# Altium PCB S10B-M-V2.0.PcbDoc (part 1 of 2)
Units mm, origin at the board's own origin, x right, y up, seen from the top; angles counter-clockwise.
Board outline 236.42 x 127.48 mm, 3 copper layers (Top Layer, Internal Plane 2, Bottom Layer); 189 components, 141 nets, 609 pads, 390 vias.
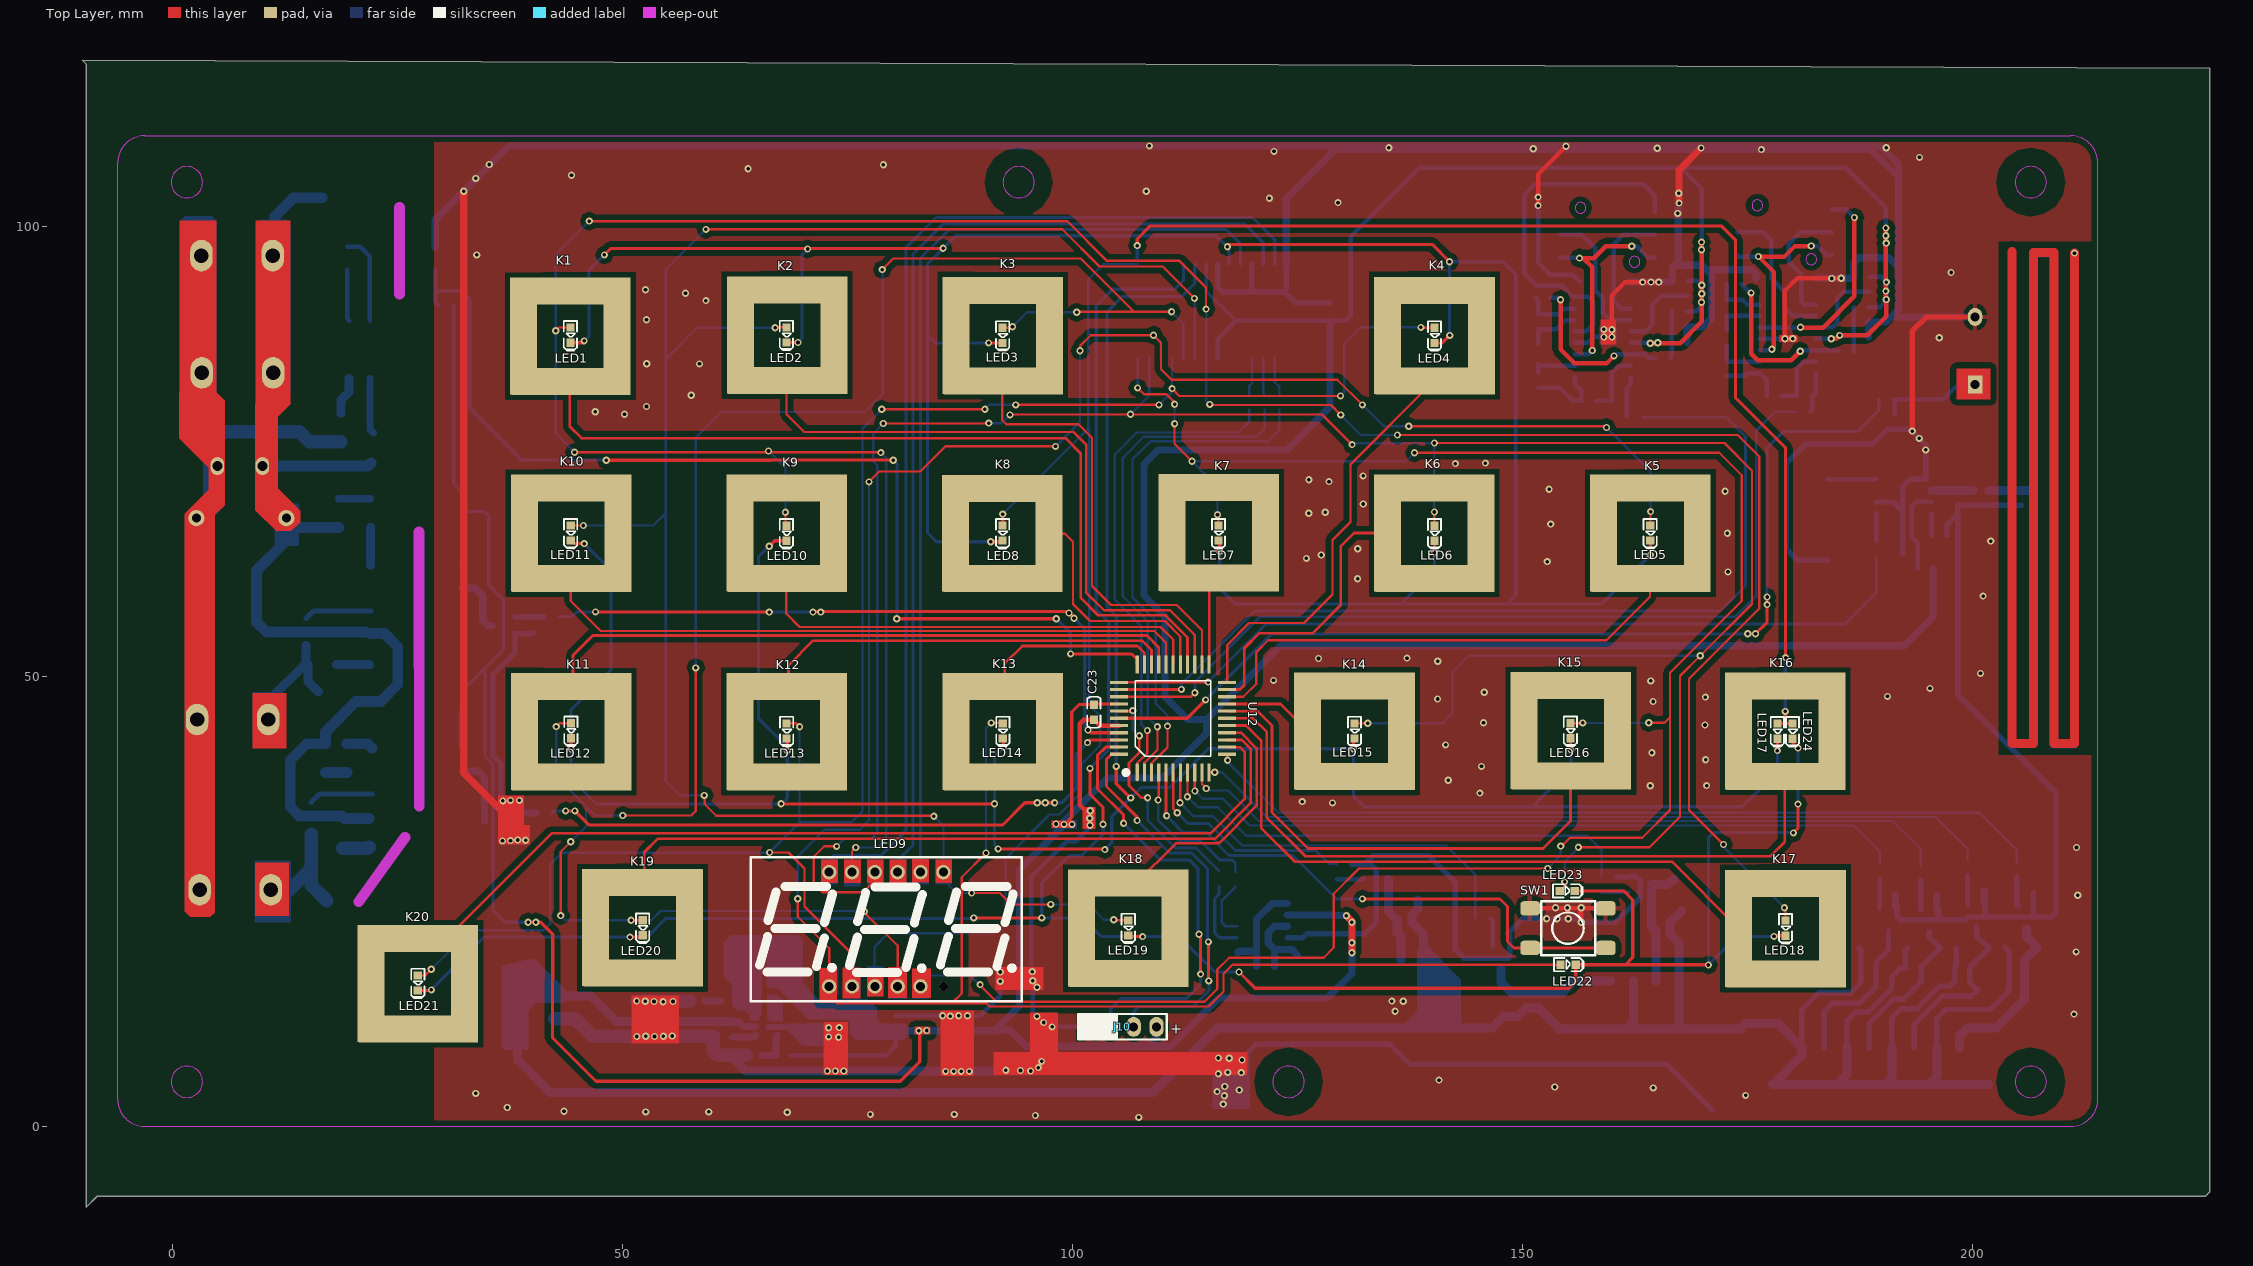
[diagram p0: Top Layer view]
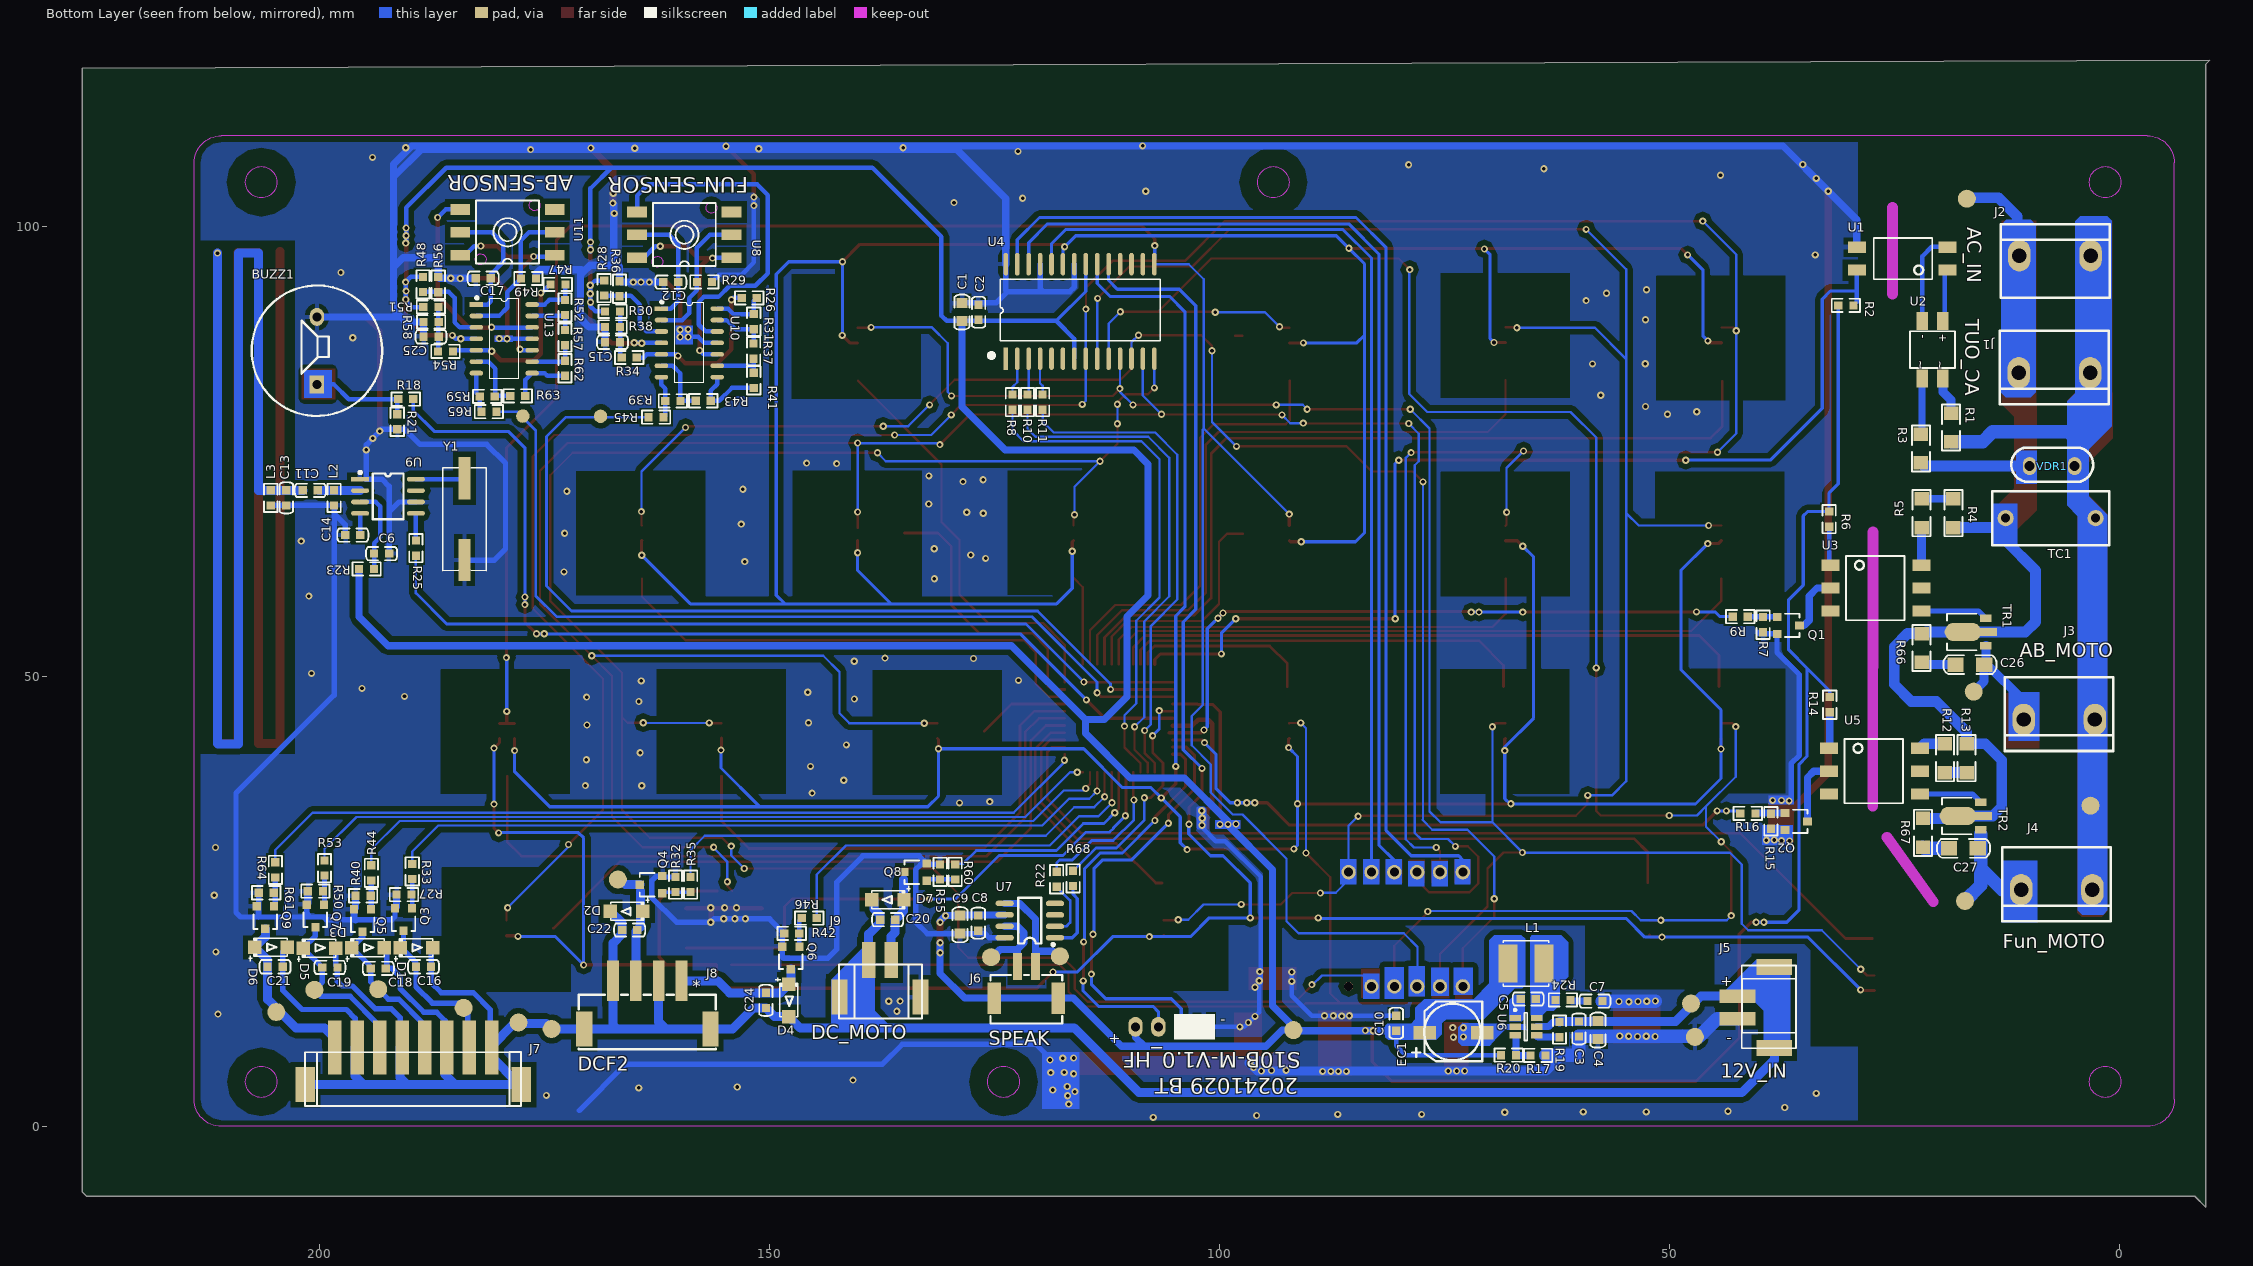
[diagram p1: Bottom Layer view, seen from below]
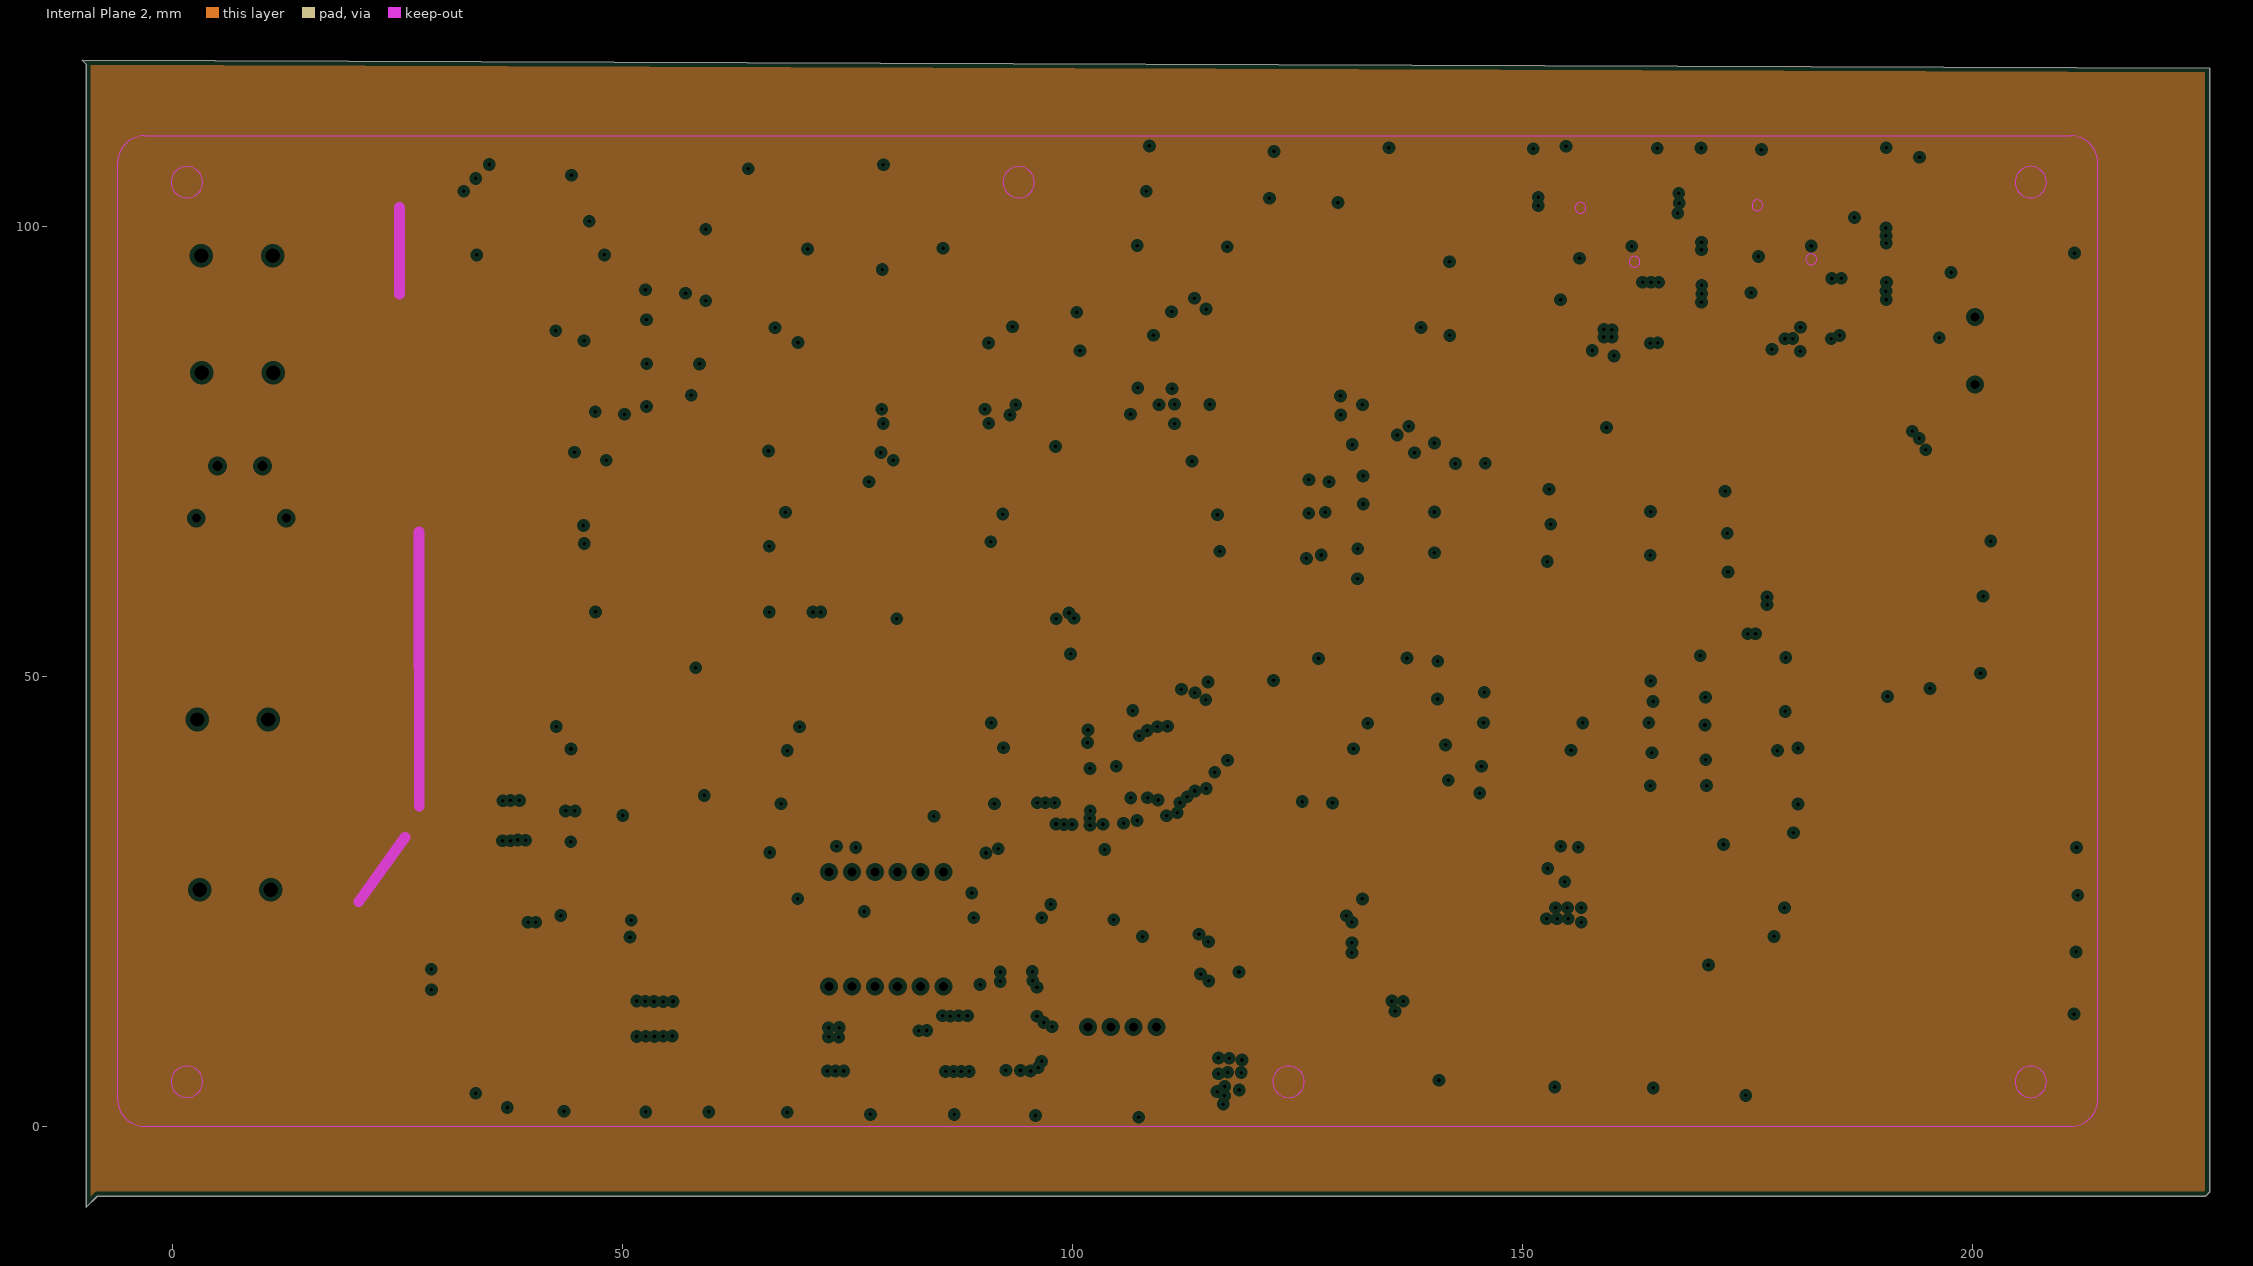
[diagram p2: Internal Plane 2, clearances drawn from the general rule]

## Layer stack, top to bottom
Top Solder: solder mask 0.0102, Solder Resist, Dk 3.5
Top Layer: signal copper 0.0356
Dielectric 1: dielectric 0.32, FR-4, Dk 4.8
Internal Plane 2: plane copper 0.0356
Dielectric2: dielectric 0.32, FR-4, Dk 4.8
Bottom Layer: signal copper 0.0356
Bottom Solder: solder mask 0.0102, Solder Resist, Dk 3.5

## Board outline
-10.033,118.466 -9.627,118.059 -9.627,-9.017 -8.382,-7.772 225.958,-7.772 226.39,-7.341 226.39,117.627

## Design rules (kind name [scope] priority, off if disabled: settings)
Clearance [All] p1: gap=0.2
MinimumSolderMaskSliver [All] p1: minsoldermaskwidth=0
PlaneClearance [All] p1: clearance=0.508
PlaneConnect [All] p1: planeconnectstyle=Relief reliefexpansion=0.508 reliefentries=4 reliefconductorwidth=0.5 reliefairgap=0.254
PolygonConnect PolygonConnect_1 [IsVia] p1: connectstyle=Direct reliefconductorwidth=0.254 reliefentries=4 polygonreliefangle="90 Angle" airgapwidth=0.254
PolygonConnect [All] p2: connectstyle=Relief reliefconductorwidth=0.5 reliefentries=4 polygonreliefangle="90 Angle" airgapwidth=0.5
RoutingVias [All] p1: holewidth=0.3 width=0.6 viastyle="Through Hole" minholewidth=0.3 minwidth=0.4 maxholewidth=1.5 maxwidth=2
SilkToSilkClearance [All] p1: silktosilkclearance=0
SilkToSolderMaskClearance [IsPad] p1: minsilkscreentomaskgap=0 clearancetoexposedcopper=TRUE
SolderMaskExpansion [All] p1: expansion=0.102
Width [All] p1: maxlimit=2 minlimit=0.2 preferedwidth=0.254 minimp=50.000000 maximp=50.000000 favimp=50.000000
25 further rules are at their usual default settings.

## Components (designator, comment, footprint, x,y, rotation, side; value= is the part's Value field where it differs from the comment)
BUZZ1 "Speaker" BUZ-1407-7.5 200.33,86.208 r0 bottom
C1 "106" 0805C 128.636,91.518 r270 bottom
C2 "104" 0603C 126.782,91.315 r270 bottom
C3 "104" 0603C 60.056,11.66 r270 bottom
C4 "106" 0805C 57.948,11.711 r270 bottom
C5 "104" 0603C 66.533,14.149 r180 bottom
C6 "1uF" 0603C 193.98,63.652 r180 bottom
C7 "103" 0603C 57.44,13.921 r0 bottom
C8 "104" 0603C 126.822,23.419 r270 bottom
C9 "106" 0805C 128.854,23.419 r270 bottom
C10 "104" 0603C 80.366,10.617 r90 bottom
C11 "2.7pF" 0603C 201.905,70.688 r180 bottom
C12 "103" 0603C 161.834,93.829 r180 bottom
C13 "5.6pF" 0603C 203.733,69.012 r90 bottom
C14 "0.47uF" 0603C 195.504,65.71 r0 bottom
C15 "103" 0603C 168.311,87.149 r180 bottom
C16 "104" 0603C 187.64,17.731 r0 bottom
C17 "103" 0603C 182.687,94.261 r180 bottom
C18 "104" 0603C 192.67,17.553 r0 bottom
C19 "104" 0603C 198.054,17.655 r0 bottom
C20 "104" 0603C 137.729,22.963 r180 bottom
C21 "104" 0603C 204.14,17.729 r0 bottom
C22 "104" 0603C 166.406,21.82 r180 bottom
C23 "104" 0603C 102.387,46.863 r270 top
C24 "104" 0603C 150.429,13.159 r90 bottom
C25 "103" 0603C 188.479,87.759 r180 bottom
C26 "102 1KV" 1206C 18.212,51.308 r180 bottom
C27 "102 1KV" 1206C 18.923,30.886 r180 bottom
D1 "A7" SOD-123FL_L2.8-W1.8-LS3.7 189.266,19.839 r180 bottom
D2 "A7" SOD-123FL_L2.8-W1.8-LS3.7 165.898,23.903 r0 bottom
D3 "A7" SOD-123FL_L2.8-W1.8-LS3.7 194.651,19.839 r180 bottom
D4 "A7" SOD-123FL_L2.8-W1.8-LS3.7 147.864,13.997 r270 bottom
D5 "A7" SOD-123FL_L2.8-W1.8-LS3.7 200.05,19.812 r180 bottom
D6 "A7" SOD-123FL_L2.8-W1.8-LS3.7 205.435,19.888 r180 bottom
D7 "A7" SOD-123FL_L2.8-W1.8-LS3.7 136.881,25.197 r0 bottom
EC1 "100uF/10V" "CAP SMD 6.3*5.5mm" 77.216,10.389 r90 bottom
J1 "AC_OUT" K-VH3.96-3P 7.199,83.745 r90 bottom
J2 "AC_IN" K-VH3.96-3P 7.148,96.776 r270 bottom
J3 "AB_MOTO" K-VH3.96-3P 6.665,45.214 r90 bottom
J4 "Fun_MOTO" K-VH3.96-3P 6.945,26.291 r90 bottom
J5 "12V_IN" "CON2-SMD-XHB 2*2.5MM" 40.397,13.21 r270 bottom
J6 "SPEAK" CON2-SMD_PH2.0-1X2PW 121.473,16.004 r0 bottom
J7 "" "CON8-SMD-XHB 8*2.5MM" 180.873,8.738 r0 bottom
J8 "DCF2" CON4-SMD_4P-P2.54_XH2.54-4AB 163.612,13.489 r0 bottom
J9 "DC_MOTO" "CON2-SMD-XHB 2*2.5MM" 137.755,16.435 r0 bottom
J10 "ISP1" "CON4 -2.54-H" 101.727,11.049 r0 top
K1 "Φ15 H8mm弹簧" TK_HF-13*13*8 44.196,87.808 r180 top
K2 "Φ15 H8mm弹簧" TK_HF-13*13*8 68.286,87.936 r180 top
K3 "Φ15 H8mm弹簧" TK_HF-13*13*8 92.253,87.884 r180 top
K4 "Φ15 H8mm弹簧" TK_HF-13*13*8 140.244,87.886 r180 top
K5 "Φ15 H8mm弹簧" TK_HF-13*13*8 164.247,65.915 r180 top
K6 "Φ15 H8mm弹簧" TK_HF-13*13*8 140.219,65.915 r180 top
K7 "Φ15 H8mm弹簧" TK_HF-13*13*8 116.266,65.965 r180 top
K8 "Φ15 H8mm弹簧" TK_HF-13*13*8 92.213,65.889 r180 top
K9 "Φ15 H8mm弹簧" TK_HF-13*13*8 68.26,65.915 r180 top
K10 "Φ15 H8mm弹簧" TK_HF-13*13*8 44.283,65.915 r180 top
K11 "Φ15 H8mm弹簧" TK_HF-13*13*8 44.283,43.867 r180 top
K12 "Φ15 H8mm弹簧" TK_HF-13*13*8 68.235,43.867 r180 top
K13 "Φ15 H8mm弹簧" TK_HF-13*13*8 92.263,43.867 r180 top
K14 "Φ15 H8mm弹簧" TK_HF-13*13*8 131.354,43.893 r180 top
K15 "Φ15 H8mm弹簧" TK_HF-13*13*8 155.408,43.944 r180 top
K16 "Φ15 H8mm弹簧" TK_HF-13*13*8 179.233,43.918 r180 top
K17 "Φ15 H8mm弹簧" TK_HF-13*13*8 179.258,21.973 r180 top
K18 "Φ15 H8mm弹簧" TK_HF-13*13*8 106.208,22.023 r180 top
K19 "Φ15 H8mm弹簧" TK_HF-13*13*8 52.208,22.049 r180 top
K20 "Φ15 H8mm弹簧" TK_HF-13*13*8 27.239,15.851 r180 top
L1 "4.7uH" INDC5050 65.924,18.112 r180 bottom
L2 "39nH" 0603R 198.425,69.012 r90 bottom
L3 "22nH" 0603R 205.461,69.012 r90 bottom
LED1 "LED_0603" LED_0603 44.207,88.8 r270 top
LED2 "LED_0603" LED_0603 68.21,88.825 r270 top
LED3 "LED_0603" LED_0603 92.238,88.775 r270 top
LED4 "LED_0603" LED_0603 140.244,88.775 r270 top
LED5 "LED_0603" LED_0603 164.222,66.804 r270 top
LED6 "LED_0603" LED_0603 140.244,66.778 r270 top
LED7 "LED_0603" LED_0603 116.241,66.804 r270 top
LED8 "LED_0603" LED_0603 92.238,66.804 r270 top
LED9 "4301AB" LED4031-SEG-TH_12P-L30.1-W16.0-P2.54-S12.70-BL 79.309,21.896 r0 top
LED10 "LED_0603" LED_0603 68.21,66.778 r270 top
LED11 "LED_0603" LED_0603 44.232,66.804 r270 top
LED12 "LED_0603" LED_0603 44.257,44.833 r270 top
LED13 "LED_0603" LED_0603 68.235,44.807 r270 top
LED14 "LED_0603" LED_0603 92.263,44.807 r270 top
LED15 "LED_0603" LED_0603 131.354,44.807 r270 top
LED16 "LED_0603" LED_0603 155.357,44.833 r270 top
LED17 "LED_0603" LED_0603 178.359,44.78 r270 top
LED18 "LED_0603" LED_0603 179.258,22.887 r270 top
LED19 "LED_0603" LED_0603 106.208,22.912 r270 top
LED20 "LED_0603" LED_0603 52.233,22.938 r270 top
LED21 "LED_0603" LED_0603 27.239,16.791 r270 top
LED22 "LED_0603" LED_0603 154.239,17.959 r0 top
LED23 "LED_0603" LED_0603 154.138,26.164 r0 top
LED24 "LED_0603" LED_0603 180.035,44.78 r270 top
Q1 "2N7002K" "SOT-23 - MOS" 36.79,55.678 r270 bottom
Q2 "2N7002K" "SOT-23 - MOS" 35.901,33.885 r270 bottom
Q3 "2N7002K" "SOT-23 - MOS" 190.703,22.962 r0 bottom
Q4 "2N7002K" "SOT-23 - MOS" 163.195,26.848 r90 bottom
Q5 "2N7002K" "SOT-23 - MOS" 195.25,22.86 r0 bottom
Q6 "2N7002K" "SOT-23 - MOS" 147.661,18.721 r0 bottom
Q7 "2N7002K" "SOT-23 - MOS" 200.508,23.393 r0 bottom
Q8 "2N7002K" "SOT-23 - MOS" 133.782,28.245 r90 bottom
Q9 "2N7002K" "SOT-23 - MOS" 206.07,23.19 r0 bottom
R1 "39K" 1206R 18.694,79.273 r270 bottom
R2 "10K" 0603 31.227,91.238 r180 bottom
R3 "39K" 1206R 22.047,76.937 r270 bottom
R4 "470R" 1206R 18.44,69.748 r270 bottom
R5 "470R" 1206R 21.971,69.748 r270 bottom
R6 "470R" 0603 32.243,68.328 r270 bottom
R7 "10K" 0603 39.584,56.593 r270 bottom
R8 "470R" 0603R 123.023,79.656 r90 bottom
R9 "1K" 0603 42.962,56.644 r180 bottom
R10 "470R" 0603R 121.346,79.656 r90 bottom
R11 "470R" 0603R 119.67,79.656 r90 bottom
R12 "470R" 1206R 19.38,39.319 r90 bottom
R13 "470R" 1206R 16.967,39.319 r90 bottom
R14 "470R" 0603 32.182,47.701 r270 bottom
R15 "10K" 0603 38.72,34.749 r270 bottom
R16 "1K" 0603 42.124,34.774 r180 bottom
R17 "10k %1" 0603R 65.441,7.876 r180 bottom
R18 "470R" 0603R 191.298,80.824 r180 bottom
R19 "100k" 0603R 62.215,11.584 r270 bottom
R20 "75K 1%" 0603R 68.718,7.901 r180 bottom
R21 "1K" 0603R 191.4,79.148 r270 bottom
R22 "1K" 0603R 118.11,28.296 r270 bottom
R23 "20R" 0603R 195.656,61.951 r180 bottom
R24 "4.7R" 0603R 60.996,14.048 r0 bottom
R25 "330R" 0603R 189.332,63.424 r90 bottom
R26 "10K/0603 1%" 0603R 151.445,92.077 r0 bottom
R27 "10K" 0603 189.814,25.756 r0 bottom
R28 "10K/0603  1%" 0603R 168.402,94.005 r270 bottom
R29 "470R/0603  5%" 0603R 158.1,93.855 r180 bottom
R30 "10K/0603  1%" 0603R 168.311,90.578 r180 bottom
R31 "10K/0603 1%" 0603R 151.776,90.273 r270 bottom
R32 "10K" 0603 160.477,26.035 r90 bottom
R33 "1K" 0603 189.738,27.483 r90 bottom
R34 "12K/0603  5%" 0603R 164.78,85.447 r0 bottom
R35 "1K" 0603 158.801,26.035 r90 bottom
R36 "1K/0603  1%" 0603R 166.7,92.253 r90 bottom
R37 "330R/0603  5%" 0603R 151.801,86.997 r270 bottom
R38 "470R/0603  5%" 0603R 166.635,88.851 r0 bottom
R39 "10K/0603  1%" 0603R 159.929,80.621 r0 bottom
R40 "10K" 0603 194.361,25.629 r0 bottom
R41 "10K/0603  1%" 0603R 151.776,82.069 r90 bottom
R42 "10K" 0603 146.721,21.439 r0 bottom
R43 "10K/0603  1%" 0603R 156.551,80.647 r0 bottom
R44 "1K" 0603 194.285,29.007 r270 bottom
R45 "1K/0603  1%" 0603R 163.474,78.816 r180 bottom
R46 "1K" 0603 146.442,23.141 r180 bottom
R47 "10K/0603 1%" 0603R 172.705,93.575 r0 bottom
R48 "10K/0603  1%" 0603R 188.544,94.412 r270 bottom
R49 "470R/0603  5%" 0603R 177.658,94.236 r180 bottom
R50 "10K" 0603 199.669,26.137 r0 bottom
R51 "10K/0603  1%" 0603R 188.504,91.061 r180 bottom
R52 "10K/0603 1%" 0603R 172.756,91.848 r270 bottom
R53 "1K" 0603 199.492,29.54 r270 bottom
R54 "12K/0603  5%" 0603R 185.202,86.133 r0 bottom
R55 "10K" 0603 131.064,27.432 r90 bottom
R56 "1K/0603  1%" 0603R 186.842,92.71 r90 bottom
R57 "330R/0603  5%" 0603R 172.756,88.495 r270 bottom
R58 "470R/0603  5%" 0603R 186.802,89.41 r0 bottom
R59 "10K/0603  1%" 0603R 180.554,81.129 r0 bottom
R60 "1K" 0603 129.388,27.432 r90 bottom
R61 "10K" 0603 205.13,25.959 r0 bottom
R62 "10K/0603  1%" 0603R 172.756,83.415 r90 bottom
R63 "10K/0603  1%" 0603R 177.176,81.18 r0 bottom
R64 "1K" 0603 204.953,29.337 r270 bottom
R65 "1K/0603  1%" 0603R 180.376,79.427 r0 bottom
R66 "470R" 1206R 21.971,54.762 r270 bottom
R67 "470R" 1206R 21.819,34.214 r270 bottom
R68 "NC" 0603R 116.281,28.397 r270 bottom
SW1 "SW-PB" BUTTON-SMD-6*6*10 155.078,22.023 r180 top
TC1 "TC X2 0.1uF/275V" CAP-TH_L13.0-W6.0-P10.00-D0.6 7.62,67.589 r0 bottom
TR1 "BTA131-600/SOT89" "SOT-89 BT131-600" 16.104,54.94 r90 bottom
TR2 "BTA131-600/SOT89" "SOT-89 BT131-600" 16.662,34.493 r90 bottom
U1 "EL817B-SMD-4" PC817-smd 19.075,95.174 r0 bottom
U2 "MB10F/MDD" DB-MB10F 20.762,86.311 r180 bottom
U3 "MOC3021-SMD6" SMD6 32.091,62.359 r180 bottom
U4 "AIP1628 SOP28" SOP28(300MIL) 123.759,85.32 r90 bottom
U5 "MOC3021-SMD6" SMD6 32.258,42.012 r180 bottom
U6 "HT7712" SOT23-6_M 65.949,11.076 r180 bottom
U7 "SOP8" SOP8-SS 121.092,22.862 r90 bottom
U8 "SOP6" PSG010R/S 159.472,99.087 r0 bottom
U9 "SYN590RD" SOP8(5.1*6.2mm) 195.529,71.933 r180 bottom
U10 "LMV324" SOP14(150mil) 162.037,90.883 r180 bottom
U11 "SOP6" PSG010R/S 179.131,99.366 r0 bottom
U12 "LQFP44" LQFP44 107.199,39.346 r90 top
U13 "LMV324" SOP14(150mil) 182.611,91.34 r180 bottom
VDR1 "CNR 07D471K" RES-TH_L9.0-W5.0-P5-D0.7-S3.00 7.468,73.381 r180 bottom
Y1 "13.52127M" HC-49S_L11.4-W4.8 183.921,67.488 r90 bottom

## Footprints (in the part's own frame and the unit in brackets; to place one, negate y for a bottom-side part, rotate by r counter-clockwise, add the part's x,y. Pads: shape width x height; smd on the part's side, far side on the other; paste and mask are expansions set on the pad)
0603 [mil]
  rect 36x36 smd: 1(0,0) 2(66,0)
  silkscreen extent -29,-29 95,29
0603C [mil]
  rect 36x36 smd: 1(0,0) 2(66,0)
  silkscreen extent -35,-29 101,29
0603R [mil]
  rect 36x36 smd: 1(0,0) 2(66,0)
  silkscreen extent -29,-29 95,29
0805C [mm]
  rect 1.14x1.2 smd: 1(0,0) 2(2,0)
  silkscreen extent -0.94,-0.84 2.97,0.84
1206C [mm]
  rect 1.8x1.6 smd: 1(0,0) 2(3.2,0)
  silkscreen extent -1.33,-1.04 4.57,1.05
1206R [mm]
  rect 1.5x1.6 smd: 1(0,0) 2(3.2,0)
  silkscreen extent -0.97,-1 4.17,1
BUTTON-SMD-6*6*10 [mm] "6*6*10MM,SMD,4"
  rrect50% 2.2x1.6 smd mask+0.102: 1(-4.2,-2.2) 2(-4.2,2.2) 2(4.2,2.2)
  rrect50% 2.2x1.6 smd paste+0 mask+0.102: 1(4.2,-2.2)
  silkscreen extent -3.03,-3 2.97,3
BUZ-1407-7.5 [mm] "1407,7.5MM"
  oval 1.6x2 hole 1: 1(0,-3.75)
  rect 1.6x2 hole 1: 2(0,3.75)
  silkscreen extent -7.25,-7.25 7.25,7.25
"CAP SMD 6.3*5.5mm" [mm] "CAP SMD 6.3*5.5mm"
  rect 1.5x2.5 smd: 1(0,0) 2(0,-6.4)
  silkscreen extent -3.18,-6.4 3.48,1.4
CAP-TH_L13.0-W6.0-P10.00-D0.6 [mm]
  round 1.8 hole 1 paste+0 mask+0.051: 1(-5,0) 2(5,0)
  silkscreen extent -6.5,-3 6.5,3
"CON2-SMD-XHB 2*2.5MM" [mm] "CON2-SMD-XHB 2*2.5MM"
  rect 1.5x4 smd paste+0: 1(-1.25,-2.05) 2(1.25,-2.05)
  rect 1.8x3.9 smd: 3(-4.5,2.05) 3(4.5,2.05)
  silkscreen extent -4.68,-1.56 4.54,4.46
CON2-SMD_PH2.0-1X2PW [mm]
  rect 1x3 smd: 1(-1,-1.756) 2(1,-1.756)
  rect 1.5x3.5 smd: 3(3.564,1.756) 4(-3.564,1.756)
  silkscreen extent -4,-0.82 4,4.58
"CON4 -2.54-H" [mm]
  rect 1.6x2.2 hole 1: 1(0,0)
  oval 1.6x2.2 hole 1: 2(2.54,0) 3(5.08,0) 4(7.62,0)
  silkscreen extent -1.07,-1.4 8.76,1.42
CON4-SMD_4P-P2.54_XH2.54-4AB [mm]
  rect 1.3x4.5 smd: 1(-3.811,-2.675) 2(-1.271,-2.675) 3(1.269,-2.675) 4(3.809,-2.675)
  rect 1.8x3.9 smd: 5(-7.011,2.675) 6(7.011,2.675)
  silkscreen extent -7.62,-1.14 7.62,4.93
"CON8-SMD-XHB 8*2.5MM" [mm] "CON8-SMD-XHB 8*2.5MM"
  rect 1.5x6 smd paste+0: 1(0,0) 2(2.5,0) 3(5,0) 4(7.5,0) 5(10,0) 6(12.5,0) 7(15,0) 8(17.5,0)
  rect 2.2x3.9 smd: 9(-3.25,4.1) 9(20.75,4.1)
  silkscreen extent -3.23,0.48 20.78,6.5
DB-MB10F [mm]
  rect 1.3x2 smd: AC1(-1.15,-3.2) AC2(1.15,-3.2) V+(1.15,3.2) V-(-1.15,3.2)
  silkscreen extent -2.51,-2.03 2.5,2.06
HC-49S_L11.4-W4.8 [mm]
  rect 4.7x1.3 smd: 1(4.553,0) 2(-4.553,0)
  silkscreen extent -5.71,-2.41 5.71,2.41
INDC5050 [mm]
  rect 2.124x4.22 smd: 1(2,0) 2(-2,0)
  silkscreen extent -2.53,-2.53 2.53,2.53
K-VH3.96-3P [mm]
  oval 3.5x2.5 hole 1.6: 1(0,3.96) 2(0,-3.96)
  silkscreen extent -3.5,-6.02 4.7,6.07
LED4031-SEG-TH_12P-L30.1-W16.0-P2.54-S12.70-BL [mm]
  round 1.6 hole 1: 1(-6.35,-6.35) 2(-3.81,-6.35) 3(-1.27,-6.35) 4(1.27,-6.35) 5(3.81,-6.35) 7(6.35,6.35) 8(3.81,6.35) 9(1.27,6.35) 10(-1.27,6.35) 11(-3.81,6.35) 12(-6.35,6.35)
  round 1 hole 1: 6(6.35,-6.35)
  silkscreen extent -15.05,-8 15.05,8
LED_0603 [mil]
  rect 36x36 smd: 1(1,0) 2(67,0)
  silkscreen extent -28,-29 101,29
LQFP44 [mm]
  oval 2x0.35 smd: 1(0,0)
  rect 2x0.35 smd: 2(0,-0.8) 3(0,-1.6) 4(0,-2.4) 5(0,-3.2) 6(0,-4) 7(0,-4.8) 8(0,-5.6) 9(0,-6.4) 10(0,-7.2) 11(0,-8) 23(12,-8) 24(12,-7.2) 25(12,-6.4) 26(12,-5.6) 27(12,-4.8) 28(12,-4) 29(12,-3.2) 30(12,-2.4) 31(12,-1.6) 32(12,-0.8) 33(12,0)
  rect 0.35x2 smd: 12(2,-10) 13(2.8,-10) 14(3.6,-10) 15(4.4,-10) 16(5.2,-10) 17(6,-10) 18(6.8,-10) 19(7.6,-10) 20(8.4,-10) 21(9.2,-10) 22(10,-10) 34(10,2) 35(9.2,2) 36(8.4,2) 37(7.6,2) 38(6.8,2) 39(6,2) 40(5.2,2) 41(4.4,2) 42(3.6,2) 43(2.8,2) 44(2,2)
  silkscreen extent -0.28,-8.19 10.19,1.49
PC817-smd [mm]
  rect 2x1.25 smd: 1(0,0) 2(0,-2.54) 3(10.1,-2.54) 4(10.1,0)
  silkscreen extent 1.71,-3.57 8.22,1.03
PSG010R/S [mm]
  rect 2.2x1.2 smd: 1(5.272,2.542) 2(5.272,0.002) 3(5.272,-2.538) 4(-5.228,-2.538) 5(-5.228,0.002) 6(-5.228,2.542)
  Keep-Out Layer circle w0.127: c3.004,2.997 r0.6
  Keep-Out Layer circle w0.127: c-2.996,-3.003 r0.6
  silkscreen extent -3.48,-3.52 3.52,3.48
RES-TH_L9.0-W5.0-P5-D0.7-S3.00 [mm]
  oval 1.5x2 hole 1.1 mask+0.051: 1(-2.5,0) 2(2.5,0)
  silkscreen extent -4.54,-1.73 4.57,2.03
SMD6 [mm]
  rect 2x1.25 smd: 1(0,0) 2(0,-2.54) 3(0,-5.08) 4(10.1,-5.08) 5(10.1,-2.54) 6(10.1,0)
  silkscreen extent 1.71,-6.11 8.22,1.03
SOD-123FL_L2.8-W1.8-LS3.7 [mm]
  rect 1.5x1.5 smd mask+0.051: 1(-1.803,0) 2(1.803,0)
  silkscreen extent -2.49,-1.52 1.8,1
SOP8(5.1*6.2mm) [mm]
  rect 2x0.51 smd: 1(0,0)
  oval 2x0.51 smd: 2(0,-1.27) 3(0,-2.54) 4(0,-3.81) 5(6.2,-3.81) 6(6.2,-2.54) 7(6.2,-1.27) 8(6.2,0)
  silkscreen extent -0.15,-4.45 4.83,0.89
SOP8-SS [mil] "BODY4.9*3.9,1.27MM,0.51MM,6.2*5.0"
  oval 24x80 smd: 1(-75,-110) 2(-25,-110) 3(25,-110) 4(75,-110) 5(75,110) 6(25,110) 7(-25,110) 8(-75,110)
  silkscreen extent -111,-108 100,50
SOP14(150mil) [mm]
  rect 1.5x0.52 smd: 1(0,0)
  oval 1.5x0.52 smd: 2(0,-1.27) 3(0,-2.54) 4(0,-3.81) 5(0,-5.08) 6(0,-6.35) 7(0,-7.62) 8(6.2,-7.62) 9(6.2,-6.35) 10(6.2,-5.08) 11(6.2,-3.81) 12(6.2,-2.54) 13(6.2,-1.27) 14(6.2,0)
  silkscreen extent -0.1,-8.25 4.72,0.89
SOP28(300MIL) [mm]
  rect 2.5x0.51 smd: 1(0,0)
  oval 2.5x0.51 smd: 2(0,-1.27) 3(0,-2.54) 4(0,-3.81) 5(0,-5.08) 6(0,-6.35) 7(0,-7.62) 8(0,-8.89) 9(0,-10.16) 10(0,-11.43) 11(0,-12.7) 12(0,-13.97) 13(0,-15.24) 14(0,-16.51) 15(10.5,-16.51) 16(10.5,-15.24) 17(10.5,-13.97) 18(10.5,-12.7) 19(10.5,-11.43) 20(10.5,-10.16) 21(10.5,-8.89) 22(10.5,-7.62) 23(10.5,-6.35) 24(10.5,-5.08) 25(10.5,-3.81) 26(10.5,-2.54) 27(10.5,-1.27) 28(10.5,0)
  silkscreen extent 0.11,-17.14 8.81,1.85
SOT23-6_M [mm] "SOT23, 6-Leads, Body 2.9x1.6mm, Pitch 0.95mm, Lead Span 2.7mm, IPC Low Density"
  rect 1.3x0.7 smd: 1(-1.2,0.95) 2(-1.2,0) 3(-1.2,-0.95) 4(1.2,-0.95) 5(1.2,0) 6(1.2,0.95)
  silkscreen extent -1.33,-1.55 0.15,1.97, body extent -0.9,-1.55 0.9,1.55, height 1.45
"SOT-23 - MOS" [mm]
  rect 0.9x0.95 smd: B(-0.95,-1.25) C(0,1.25) E(0.95,-1.25)
  silkscreen extent -1.3,-0.38 1.3,1.25
"SOT-89 BT131-600" [mil]
  rect 34x50 smd: 1(-60,-50) 3(60,-50)
  oval 80x160 smd: 2(-0.1,50)
  rect 34x100 smd: 2(0,-50)
  silkscreen extent -80,-10 80,120
TK_HF-13*13*8 [mm] "TK_HF-13*13*8,3MM edge"
  rect 3x13 smd paste+0: 2(-5.204,0.022)
  rect 13x3 smd: 2(-0.2,-5.026) 2(0.054,5.026)
  rect 3x13 smd: 2(5.204,-0.029)

## Part data
BUZZ1: "Loudspeaker"
C1 C2 C3 C4 C5 C6 C7 C8 C9 C10 C11 C12 C13 C14 C15 C16 C17 C18 C19 C20 C21 C22 C23 C24 C25 C26 C27: library part Cap, "Capacitor"
D1 D2 D3 D4 D5 D6 D7: library part "Diode 1N4007", "1 Amp General Purpose Rectifier"
EC1: library part "Cap Pol1", "Polarized Capacitor (Radial)"
J1 J2 J3 J4: library part PITCH3.96-5.0-2A
J5: library part PITCH2.5-2A
J6 J9: library part CON2
J7: library part CON8
J8 J10: library part CON4
K1 K2 K3 K4 K5 K6 K7 K8 K9 K10 K11 K12 K13 K14 K15 K16 K17 K18 K19 K20: library part TOUCH-PAD
L1 L2 L3: library part Inductor, "Inductor"
LED1 LED2 LED3 LED4 LED5 LED6 LED7 LED8 LED10 LED11 LED12 LED13 LED14 LED15 LED16 LED17 LED18 LED19 LED20 LED21 LED22 LED23 LED24: library part LED
LED9: library part "LED-888-COM VCC-1"
Q1 Q2 Q3 Q4 Q5 Q6 Q7 Q8 Q9: library part NPN-8050-BCE-25V/500mA
R1 R3 R4 R5 R12 R13 R66 R67: library part 1Ω±1%/0805-1206
R2 R6 R7 R9 R14 R15 R16 R27 R32 R33 R35 R40 R42 R44 R46 R50 R53 R55 R60 R61 R64: library part 1Ω±1%/0603-0805
R8 R10 R11 R17 R18 R19 R20 R21 R22 R23 R24 R25 R26 R28 R29 R30 R31 R34 R36 R37 R38 R39 R41 R43 R45 R47 R48 R49 R51 R52 R54 R56 R57 R58 R59 R62 R63 R65 R68: library part Res1, "Resistor"
SW1: "Switch"
TC1: library part CAP1
TR1 TR2: library part Triac
U1: library part EL817-DIP-4
U2: library part BD-ABS10/MB10S, "Diode Bridge"
U3 U5: library part MOC3021-DIP-6
U4: library part "TM1628 SOP28", "LED driver, SOP28"
U6: library part SOP6
U9: library part SOP8
U10 U13: library part SOP14
VDR1: library part VAR
Y1: library part XTAL, "Crystal Oscillator"

## Free pads (board coordinates)
  round 2 smd far side: 1(47.6,13.64) 2(47.168,9.931) 3(3.2,35.636) 4(16.942,103.099) 5(17.145,25.044) 6(16.18,48.311) 7(91.796,10.693) 8(117.754,18.898) 9(125.4,18.796) 10(166.878,27.432) 11(174.244,10.814) 16(177.927,11.532) 16(184.023,13.157) 16(193.523,15.24) 16(200.609,15.164) 16(204.851,12.7)
  round 1.5 smd far side: 17(168.808,78.918) 18(177.444,78.943)

## Via types
v1: diameter 0.8, hole 0.4, Top Layer to Bottom Layer, tented both sides, 390 vias

## Nets (pads, with @x,y where several pads share a name; then routed paths per layer and width w, separated by ;. In a path a pad name is that pad's centre, name@x,y a point inside that pad or via, vN(x,y) a via of type N, cw(c..) or ccw(c..) an arc to the next point about the centre after c; other vN are vias at no path point)
5V: C1.2 C2.2 C8.1 C9.1 C10.1 C23.1 EC1.1 J6.3 J6.4 J10.4 L1.2 pad.7 R2.1 R6.1 R14.1 R20.1 R23.1 R28.1 R30.1 R48.1 R51.1 U4.7 U4.21 U7.6 U10.4 U12.37 U13.4 | length 634.4
  Top Layer w0.35: v1(39.497,22.682) 40.919,22.682 42.24,21.361 42.24,16.358 42.215,16.332 42.215,9.83 47.041,5.004 80.874,5.004 83.033,7.163 83.033,10.643 v1@82.982,10.693 ; v1@99.085,33.528 99.924,34.366 99.924,46.05 100.736,46.863 C23.1@102.387,46.863 ; C23.1@102.471,46.946 U12.37@105.198,46.946
  Top Layer w0.5: v1(164.236,87.046) 167.564,87.046 169.926,89.408 v1(169.926,98.273) ; v1(184.353,87.528) 184.912,87.528 185.293,87.909 188.341,87.909 190.449,90.018 v1(190.449,91.897) ; v1@190.424,91.897 v1(190.424,99.847)
  Top Layer w0.8: v1(130.454,23.393) 131.064,22.784 v1(131.064,19.279)
  Bottom Layer w0.35: R2.1@31.227,91.238 31.227,71.414 32.243,70.398 R6.1@32.243,68.328 34.644,68.328 35.128,67.843 35.128,60.147 36.754,58.522 36.754,52.959 34.709,50.914 ; R14.1@32.182,47.701 32.182,48.387 34.709,50.914 ; v1@40.589,22.682 36.957,22.682 35.585,24.054 35.585,40.234 34.709,41.11 34.709,50.914 ; v1@82.982,10.617 v1@82.982,10.693 ; U4.21@114.869,95.82 114.869,92.792 118.144,89.518
  Bottom Layer w0.5: R20.1@68.718,7.901 79.326,7.901 80.366,8.941 C10.1@80.366,10.617 ; U4.7@116.139,85.32 116.139,87.514 118.144,89.518 C1.2@128.636,89.518 130.336,89.518 130.912,90.094 130.912,98.882 138.582,106.553 167.615,106.553 ; U10.4@162.037,87.073 v1@165.251,87.073 ; R30.1@168.311,90.578 169.369,90.578 169.951,91.161 v1(169.951,93.472) 169.418,94.005 R28.1@168.402,94.005 ; v1@169.926,97.18 169.926,104.242 167.615,106.553 ; U13.4@182.611,87.53 184.888,87.53 v1(185.268,87.909) ; R51.1@188.504,91.061 189.765,91.061 v1@190.475,91.77 ; R48.1@188.544,94.412 189.89,94.412 v1(190.475,93.828) v1@190.475,91.897 ; v1@190.424,98.171 190.424,102.083 185.953,106.553 167.615,106.553
  Bottom Layer w0.8: C10.1@80.366,10.617 82.982,10.617 pad.7@91.338,10.617 ; pad.7@91.796,10.617 pad.7@91.338,10.617 ; pad.7@91.796,10.693 93.04,10.693 94.844,8.89 108.382,8.89 ; J10.4@109.347,11.049 109.347,9.855 108.382,8.89 ; U7.6@123.886,23.497 128.776,23.497 C9.1@128.854,23.419 130.454,23.419 v1@131.064,22.809 ; C1.2@128.636,89.518 128.636,79.97 123.825,75.159 109.525,75.159 107.95,73.584 107.95,59.004 110.287,56.667 110.287,47.752 112.827,45.212 114.91,45.212 ; v1(131.064,20.396) 131.064,16.993 128.32,14.248 J6.3@125.037,14.248 J6.4@117.909,14.248 116.255,14.248 110.896,8.89 108.382,8.89 ; R23.1@195.656,61.951 195.656,56.642 192.43,53.416 123.114,53.416 114.91,45.212 ; pad.7@91.338,10.617 94.107,13.386 94.107,28.55 99.085,33.528 99.085,33.909 103.899,38.722 109.944,38.722 114.91,43.688 114.91,45.212
  Bottom Layer w1.5: L1.2@67.923,18.112 67.923,16.405 71.399,12.929 75.844,12.929 77.216,11.557 EC1.1@77.216,10.389 77.445,10.617 C10.1@80.366,10.617
  other v1: 82.931,10.617 83.795,10.643 40.361,22.682 131.064,22.682 99.06,33.553 99.949,33.553 98.171,33.604 165.049,87.097 169.926,91.592 169.951,92.532 190.424,92.837 169.926,97.434 190.449,98.171 190.424,98.984
+12V: C3.1 C4.1 C16.1 C18.1 C19.1 C20.1 C21.1 C22.1 C24.1 D1.2 D2.2 D3.2 D4.2 D5.2 D6.2 D7.2 J5.1 J5.3 J7.1 J7.3 J7.5 J7.7 J7.9 J8.2 J8.4 J8.5 J8.6 J9.2 J9.3@142.255,14.385 pad.1 pad.11 pad.16@177.927,11.532 R19.1 U6.5 | length 332.7
  Bottom Layer w0.6: J7.1@181.077,8.738 181.077,12.979 182.956,14.859 186.512,14.859 187.64,15.987 C16.1@187.64,17.731 187.64,19.661 D1.2@187.463,19.839 ; J7.3@186.077,8.738 186.077,11.731 187.02,12.675 188.443,12.675 191.084,15.316 191.084,16.637 192,17.553 C18.1@192.557,17.553 ; J7.5@191.077,8.738 191.077,12.083 192.075,13.081 193.878,13.081 196.393,15.596 197.536,15.596 198.054,16.114 198.054,16.165 ; C18.1@192.67,17.553 C18.1@192.557,17.553 ; D3.2@192.847,19.839 192.557,19.549 C18.1@192.557,17.553 ; J7.7@196.077,8.738 196.077,12.003 197.053,12.979 201.981,12.979 204.14,15.138 C21.1@204.14,17.729 204.14,19.38 D6.2@203.632,19.888 ; 197.917,16.027 198.054,16.165 ; C19.1@198.037,17.672 198.247,17.882 D5.2@198.247,19.812 ; C19.1@198.054,17.655 198.054,16.165
  Bottom Layer w0.8: R19.1@62.215,11.584 62.94,11.584 63.448,11.076 U6.5@64.749,11.076
  Bottom Layer w1: J5.3@38.346,17.71 J5.1@41.597,14.46 ; R19.1@62.215,11.584 62.139,11.66 C3.1@60.056,11.66 49.3,11.66 46.5,14.46 J5.1@42.446,14.46 J5.1@41.597,14.46 ; 137.211,10.922 146.592,10.922 D4.2@147.864,12.194 149.464,12.194 C24.1@150.429,13.159 151.789,13.159 154.134,10.814 J8.5@156.601,10.814 161.538,10.814 ; D7.2@138.415,25.148 138.415,24.166 137.729,23.48 C20.1@137.729,22.963 137.729,22.621 139.005,21.345 J9.2@139.005,18.485 139.005,12.106 137.846,10.947 116.154,10.947 108.941,3.734 41.986,3.734 38.346,7.374 J5.3@38.346,8.71 38.346,12.921 39.885,14.46 J5.1@41.597,14.46 ; J8.2@162.341,16.164 162.341,11.618 161.538,10.814 ; D2.2@167.701,23.903 166.406,22.608 C22.1@166.406,21.82 166.406,21.376 167.421,20.361 J8.4@167.421,16.164 167.421,11.237 166.999,10.814 ; J7.3@186.077,8.738 186.077,5.751 184.963,4.638 ; J7.5@191.077,8.738 191.077,5.417 190.297,4.638 ; J7.7@196.077,8.738 196.077,5.566 195.148,4.638 ; J7.9@201.827,4.638 195.148,4.638 ; 161.538,10.814 166.999,10.814 ; 166.999,10.814 J8.6@170.623,10.814 pad.11@174.244,10.814 174.86,11.43 178.384,11.43 181.077,8.738 181.077,7.888 177.827,4.638 184.963,4.638 ; 184.963,4.638 190.297,4.638 ; 190.297,4.638 195.148,4.638
A: C22.2 D2.1 J8.3 pad.10 Q4.C | length 12.8
  Bottom Layer w1: 164.374,26.133 164.374,22.176 C22.2@164.73,21.82 164.881,21.669 J8.3@164.881,16.164 ; Q4.C@164.445,26.848 166.014,26.848 pad.10@166.878,27.432
AB_MO: R9.1 U12.41 | length 76.9
  Top Layer w0.35: v1(46.99,57.175) 47.015,57.15 v1(66.294,57.15) ; v1(71.171,57.15) 71.222,57.201 99.466,57.201 v1@100.254,56.413 ; v1(101.727,44.044) 102.032,43.739 105.631,43.739 U12.41@105.639,43.746
  Bottom Layer w0.35: R9.1@42.962,56.644 44.374,56.644 44.88,57.15 v1@46.99,57.15 ; v1(66.294,57.15) v1(71.171,57.15) v1(72.034,57.15) v1@72.288,57.15 ; v1(99.619,57.048) 101.371,55.296 101.371,44.399 v1(101.727,44.044)
  other v1: 100.178,56.464
ANT: C11.1 C13.2 L3.2 | length 370.4
  Top Layer w1: 204.419,97.257 204.419,42.57 206.781,42.57 206.807,42.545 206.807,97.13 209.118,97.13 209.118,42.545 211.353,42.545 211.379,42.52 v1(211.379,97.053)
  Bottom Layer w1: C11.1@201.905,70.688 C13.2@203.733,70.688 L3.2@205.461,70.688 206.832,70.688 206.832,97.079 209.067,97.079 209.067,42.469 211.303,42.469 211.379,42.545 v1(211.379,97.053)
B: C24.2 D4.1 J8.1 Q6.C | length 14.6
  Bottom Layer w1: Q6.C@147.661,17.471 147.661,16.004 D4.1@147.864,15.8 148.829,14.835 C24.2@150.429,14.835 154.459,14.835 155.788,16.164 J8.1@159.801,16.164
BA: C18.2 D3.1 J7.4 pad.16@193.523,15.24 Q5.C | length 17.3
  Bottom Layer w0.6: J7.4@188.577,8.738 188.577,11.462 191.237,14.122 192.405,14.122 pad.16@193.523,15.24 194.346,16.063 C18.2@194.346,17.553 194.346,17.731 D3.1@196.454,19.839 195.25,21.043 Q5.C@195.25,21.61
BP: R18.2 U12.39 | length 112.9
  Top Layer w0.35: U12.39@105.198,45.346 112.758,45.346 v1(114.808,47.396) ; v1(175.057,54.737) v1(175.92,54.737) 177.216,56.032 v1(177.216,57.988) v1@177.216,58.801
  Bottom Layer w0.35: v1(114.808,47.396) 122.149,54.737 v1(175.92,54.737) ; v1(177.216,57.988) 177.216,75.413 179.045,77.241 187.3,77.241 189.622,79.563 R18.2@189.622,80.824
  other v1: 177.216,58.826
BUSY: R68.1 U12.38 | length 26
  Top Layer w0.3: U12.38@105.198,46.146 106.649,46.146 v1(106.705,46.203) ; v1(107.442,43.409) 107.442,41.529 106.299,40.386 106.299,37.871 107.645,36.525 v1(108.356,36.525)
  Bottom Layer w0.3: v1(106.705,46.203) 106.705,44.145 v1(107.442,43.409) ; v1(108.356,36.525) 108.356,34.036 111.455,30.937 113.741,30.937 R68.1@116.281,28.397
CK: R10.1 U12.2 | length 56.4
  Top Layer w0.254: U12.2@107.999,39.346 107.999,40.409 109.449,41.859 v1(109.449,44.399)
  Bottom Layer w0.254: v1(109.449,44.399) 108.382,45.466 108.382,56.109 105.588,58.903 105.588,74.295 107.925,76.632 120.447,76.632 121.346,77.531 R10.1@121.346,79.656
DA: R8.1 U12.3 | length 57.1
  Top Layer w0.254: U12.3@108.799,39.346 108.799,40.346 110.566,42.113 v1(110.566,44.475)
  Bottom Layer w0.254: v1(110.566,44.475) 110.566,45.682 109.258,46.99 109.258,56.198 106.68,58.776 106.68,74.143 108.687,76.149 121.793,76.149 123.023,77.379 R8.1@123.023,79.656
DA_SP: R22.1 U12.4 | length 16.8
  Top Layer w0.3: v1@109.599,36.271 U12.4@109.599,39.346
  Bottom Layer w0.3: v1(109.525,36.271) 109.525,34.061 111.823,31.763 114.211,31.763 116.375,29.599 117.772,29.599 118.11,29.261 R22.1@118.11,28.296
DC_MO: R60.2 U12.6 | length 24.8
  Top Layer w0.3: U12.6@111.199,39.346 111.199,35.334 v1@111.671,34.862
  Bottom Layer w0.3: v1(111.658,34.849) 112.852,33.655 115.138,33.655 118.135,30.658 127.037,30.658 128.499,29.196 129.3,29.196 R60.2@129.388,29.108
DCF_A: R35.2 U12.8 | length 54.2
  Top Layer w0.254: v1@112.799,36.63 U12.8@112.799,39.346
  Bottom Layer w0.254: v1(112.776,36.627) 113.944,35.458 116.154,35.458 119.329,32.283 157.226,32.283 158.801,30.709 R35.2@158.801,27.711
DCF_B: R46.2 U12.7 | length 44.3
  Top Layer w0.254: v1@111.999,35.966 U12.7@111.999,39.346
  Bottom Layer w0.254: v1(111.963,35.966) 113.462,34.468 115.621,34.468 118.872,31.217 141.529,31.217 144.765,27.98 R46.2@144.765,23.141
DCF_BL: R44.1 U12.10 | length 86
  Top Layer w0.254: U12.10@114.399,39.346 114.399,38.052 v1@114.897,37.554
  Bottom Layer w0.254: v1(114.884,37.541) 115.113,37.313 117.323,37.313 120.701,33.934 191.135,33.934 194.285,30.785 R44.1@194.285,29.007
DCF_L: R64.1 U12.12 | length 94
  Top Layer w0.254: U12.12@117.199,41.346 117.199,40.739 v1(117.246,40.691)
  Bottom Layer w0.254: v1(117.246,40.691) 117.246,40.488 122.892,34.842 200.819,34.842 204.953,30.709 R64.1@204.953,29.337
DCF_LG: R33.2 U12.9 | length 82.3
  Top Layer w0.254: v1@113.599,37.328 U12.9@113.599,39.346
  Bottom Layer w0.254: v1(113.614,37.262) 114.478,36.398 116.738,36.398 119.71,33.426 186.842,33.426 189.738,30.531 R33.2@189.738,29.159
DCF_R: R53.1 U12.11 | length 89.1
  Top Layer w0.254: U12.11@115.199,39.346 v1@115.824,39.346
  Bottom Layer w0.254: v1(115.824,39.345) 116.637,39.345 121.593,34.388 195.939,34.388 199.492,30.836 R53.1@199.492,29.54
FUN_MO: R16.1 U12.42 | length 73
  Top Layer w0.35: v1@43.612,35.052 v1(43.663,35.052) v1(44.704,35.052) 46.279,33.477 92.227,33.477 94.717,35.966 v1(98.019,35.966) ; v1(101.676,42.647) 101.976,42.946 U12.42@105.198,42.946
  Bottom Layer w0.35: R16.1@42.124,34.774 42.401,35.052 v1(43.663,35.052) v1(44.704,35.052) ; v1(96.088,35.966) 98.806,35.966 100.406,37.567 100.406,41.377 v1(101.676,42.647)
  other v1: 96.977,35.966
GND: BUZZ1.1 C1.1 C2.1 C3.2 C4.2 C6.2 C7.1 C8.2 C9.2 C10.2 C12.1 C13.1 C14.2 C15.1 C17.1 C23.2 C25.1 EC1.2 J5.2 J9.3@133.255,14.385 J10.1 L2.1 L3.1 pad.2 Q1.E Q2.E Q3.E Q4.E Q5.E Q6.E Q7.E Q8.E Q9.E R7.2 R15.2 R17.2 R21.2 R27.2 R29.2 R32.2 R36.2 R38.2 R40.2 R42.2 R49.2 R50.2 R55.2 R56.2 R58.2 R61.2 SW1.1 U1.3 U4.22 U4.25 U4.28 U6.2 U7.8 U9.1 U9.6 U10.11 U12.40 U13.11 Y1.2 | length 935
  Top Layer w0.5: v1@101.956,33.376 v1(101.956,33.452) 101.956,34.569 100.813,35.712 100.813,44.755 101.244,45.187 C23.2@102.387,45.187 103.028,44.546 U12.40@105.198,44.546 ; SW1.1@150.877,24.223 156.489,24.223 SW1.1@159.277,24.223 ; v1(151.765,102.337) 151.765,105.842 v1(154.864,108.941) ; v1(159.969,87.732) 159.969,92.38 161.417,93.828 v1(165.176,93.828) ; v1(179.199,87.53) 179.199,92.889 180.569,94.259 v1(185.445,94.259)
  Top Layer w0.6: v1(36.652,31.725) 36.703,31.775 v1(36.703,36.17) ; v1@156.489,24.223 156.489,22.758 v1(156.566,22.682) ; v1(193.345,77.267) 193.345,88.392 194.91,89.958 BUZZ1.1@200.33,89.958
  Top Layer w0.8: v1(32.347,103.924) 32.347,39.281 36.347,35.281 ; v1(167.437,102.616) 167.437,106.299 v1(169.875,108.737)
  Bottom Layer w0.5: C10.2@80.366,12.294 89.764,12.294 91.973,14.503 v1(91.973,17.145) ; v1(95.58,16.18) 95.58,15.773 ; J10.1@101.727,11.049 97.231,11.049 95.58,12.7 95.58,15.773 ; v1@101.956,33.376 101.956,33.223 100.432,31.699 99.365,31.699 95.402,27.737 95.402,15.951 95.58,15.773 ; v1@151.765,103.454 151.765,96.012 153.111,94.666 155.613,94.666 R29.2@156.424,93.855 ; U10.11@155.837,87.073 157.304,87.073 157.963,87.732 v1(159.969,87.732) ; U13.11@176.411,87.53 v1(179.199,87.53)
  Bottom Layer w0.6: v1(36.652,31.725) 36.652,32.437 Q2.E@37.151,32.935 39.184,32.935 39.046,33.072 R15.2@38.72,33.072 ; v1(36.703,36.17) 36.464,36.409 36.464,40.31 35.56,41.214 35.56,50.19 38.04,52.67 Q1.E@38.04,54.728 39.971,54.728 40.081,54.839 ; U6.2@67.149,11.076 68.502,11.076 ; U4.22@116.139,95.82 116.139,93.284 116.662,92.761 119.583,92.761 ; 116.764,4.902 116.764,5.486 120.396,9.119 135.255,9.119 137.465,6.909 166.014,6.909 171.171,1.753 ; U4.25@119.949,95.82 119.949,93.127 119.583,92.761 ; U4.28@123.759,95.82 123.759,92.924 123.596,92.761 ; U7.8@123.886,20.957 125.605,20.957 126.067,21.419 C9.2@128.854,21.419 132.493,21.419 133.782,22.708 133.782,28.524 133.198,29.108 R55.2@131.064,29.108 ; C1.1@128.636,91.518 124.839,91.518 123.596,92.761 ; Q8.E@132.532,29.195 133.385,30.048 139.649,30.048 142.545,27.153 142.545,19.685 143.561,18.669 148.463,18.669 148.611,18.817 Q6.E@148.611,19.971 148.611,21.226 R42.2@148.397,21.439 150.021,23.063 156.185,23.063 v1(156.566,22.682) 160.362,22.682 163.119,25.439 163.119,27.28 162.601,27.798 Q4.E@161.945,27.798 ; R32.2@160.477,27.711 Q4.E@161.859,27.711 ; Y1.2@183.921,62.935 180.6,62.935 179.375,64.16 179.375,73.711 181.458,75.794 188.874,75.794 190.552,77.472 R21.2@191.4,77.472 193.115,77.472 v1(194.132,76.454) 194.843,75.743 v1(194.843,75.184) 194.843,71.933 193.116,71.933 192.303,71.12 192.303,68.301 ; U9.6@189.329,69.393 191.211,69.393 192.303,68.301 ; Q3.E@191.653,24.212 191.653,23.332 192.024,22.962 196.037,22.962 199.288,22.962 199.593,23.266 201.092,23.266 ; C6.2@192.303,63.652 192.303,68.301 ; C14.2@197.18,65.71 197.18,66.853 198.425,68.097 ; Q7.E@201.458,24.643 201.458,23.632 201.092,23.266 ; L3.1@205.461,69.012 C13.1@203.733,69.012 L2.1@198.425,69.012 198.425,68.097 ; R61.2@206.807,25.959 206.807,23.292 206.781,23.266 ; 119.583,92.761 123.596,92.761 ; 198.425,68.097 198.425,47.93 209.321,37.033 209.321,23.774 208.813,23.266 206.781,23.266 ; 201.092,23.266 206.781,23.266
  Bottom Layer w0.8: U1.3@29.175,97.714 29.175,100.753 v1(32.347,103.924) 37.389,108.966 v1(108.56,108.966) 189.789,108.966 191.821,106.934 191.821,105.512 ; 68.502,11.076 69.19,10.389 EC1.2@70.816,10.389 ; U4.28@123.759,95.82 123.759,103.135 129.21,108.585 188.747,108.585 191.821,105.512 ; C12.1@161.834,93.829 166.6,93.829 R36.2@166.7,93.929 166.7,95.529 166.878,95.707 167.335,95.707 ; v1(167.437,102.616) 167.335,102.514 167.335,95.707 ; C15.1@168.311,87.149 R38.2@168.311,88.851 170.105,88.851 171.018,89.764 171.018,94.64 170.688,94.971 ; R49.2@175.982,94.236 175.982,94.757 175.539,95.199 170.917,95.199 170.688,94.971 ; C17.1@182.687,94.261 186.717,94.261 R56.2@186.842,94.386 186.842,95.961 187.427,96.545 190.754,96.545 191.821,95.479 ; C25.1@188.479,87.759 R58.2@188.479,89.41 190.451,89.41 190.999,89.958 ; R27.2@191.491,25.756 191.491,24.374 Q3.E@191.653,24.212 ; 196.037,22.962 196.2,23.124 Q5.E@196.2,24.11 196.037,24.273 R40.2@196.037,25.629 ; BUZZ1.1@200.33,89.958 190.999,89.958 ; R50.2@201.346,26.137 201.346,24.755 Q7.E@201.458,24.643 ; 167.335,95.707 169.951,95.707 170.688,94.971 ; 190.999,89.958 191.821,90.78 191.821,95.479 ; 191.821,95.479 191.821,105.512
  Bottom Layer w1: 62.382,7.876 62.382,7.442 63.703,6.121 95.783,6.121 v1@96.723,7.061
  Bottom Layer w1.5: J5.2@42.446,11.96 44.708,11.96 46.684,9.984 C3.2@60.056,9.984 60.056,8.371 60.552,7.876 62.382,7.876 R17.2@63.765,7.876 ; v1@51.562,13.919 v1(51.564,13.921) C7.1@57.44,13.921
  other v1: 107.366,0.991 95.885,1.194 77.546,1.321 86.868,1.321 68.301,1.549 52.578,1.6 59.588,1.6 43.485,1.676 37.186,2.083 116.764,2.464 116.891,3.404 174.828,3.429 33.68,3.658 116.078,3.861 118.542,4.039 164.567,4.267 153.619,4.369 116.942,4.42 140.741,5.131 116.23,5.842 118.77,5.969 117.272,5.994 85.903,6.096 86.792,6.096 87.63,6.096 88.544,6.096 72.771,6.147 73.66,6.147 74.574,6.147 95.352,6.147 94.234,6.198 92.608,6.223 96.215,6.528 96.571,7.214 118.847,7.366 117.424,7.569 116.23,7.595 74.016,9.906 72.898,9.931 51.587,9.982 53.543,9.982 52.578,10.008 54.534,10.008 55.524,10.033 72.898,10.947 74.092,10.973 97.739,11.049 96.799,11.532 96.063,12.217 86.411,12.243 85.573,12.294 87.351,12.294 88.341,12.294 211.328,12.471 135.865,12.776 54.508,13.843 53.492,13.868 55.601,13.868 52.527,13.894 136.779,13.894 135.509,13.919 96.063,15.443 91.973,16.104 95.529,17.196 211.557,19.38 152.705,23.063 153.873,23.063 155.118,23.063 153.695,24.282 155.016,24.282 156.566,24.282 211.734,25.679 211.607,30.988 37.541,31.75 39.218,31.801 38.354,31.826 101.93,34.239 101.981,35.077 128.905,35.941 125.552,36.093 37.541,36.22 38.532,36.22 145.288,37.033 164.236,37.846 170.485,37.871 141.783,38.456 145.466,40.005 170.383,40.742 164.414,41.529 141.478,42.393 170.307,44.602 145.694,44.856 164.541,47.219 140.589,47.498 170.358,47.701 190.602,47.777 145.771,48.235 195.326,48.666 164.287,49.505 122.352,49.555 200.939,50.343 140.614,51.689 127.356,51.994 137.185,52.045 201.219,58.928 131.699,60.858 172.872,61.62 152.781,62.763 126.009,63.119 127.66,63.5 131.724,64.186 202.082,65.049 172.796,65.913 153.162,66.929 126.263,68.148 128.092,68.25 132.334,69.164 172.542,70.587 152.984,70.815 128.524,71.653 126.289,71.857 132.309,72.288 142.57,73.66 145.898,73.711 50.216,79.146 46.965,79.426 52.654,80.01 57.633,81.255 58.547,84.734 52.68,84.76 180.061,87.554 196.342,87.655 159.08,87.732 159.969,88.544 159.08,88.57 52.654,89.637 59.258,91.77 56.998,92.583 52.553,92.989 163.373,93.828 164.313,93.829 184.404,94.234 197.663,94.894 33.782,96.85 167.284,101.473 129.515,102.667 121.895,103.149 151.765,103.276 167.386,103.708 108.204,103.937 33.68,105.359 44.323,105.715 63.957,106.426 78.994,106.883 35.179,106.909 194.158,107.696 122.403,108.356 176.581,108.56 151.232,108.661 164.998,108.712 135.179,108.763 190.449,108.763
GRID1: LED9.12 U4.27 | length 122.2
  Bottom Layer w0.35: LED9.12@72.959,28.246 72.959,29.602 73.431,30.074 78.689,30.074 81.483,32.868 81.483,97.663 84.836,101.016 120.015,101.016 122.489,98.541 U4.27@122.489,95.82
GRID2: LED9.9 U4.26 | length 113.1
  Bottom Layer w0.35: LED9.9@80.579,28.179 80.579,29.551 82.296,31.267 82.296,96.952 85.649,100.305 119.126,100.305 121.219,98.211 U4.26@121.219,95.82
GRID3: LED9.8 U4.24 | length 108.3
  Bottom Layer w0.35: LED9.8@83.119,27.965 83.119,96.505 86.284,99.67 117.119,99.67 118.679,98.11 U4.24@118.679,95.82
GRID4: LED1.2 LED2.2 LED3.2 LED4.2 LED5.2 LED6.2 LED7.2 LED8.2 U4.23 | length 293.9
  Top Layer w0.35: LED1.2@44.207,87.098 45.518,87.098 v1(45.72,87.3) ; v1(47.981,96.85) 48.692,97.561 v1@70.561,97.561 ; LED2.2@68.21,87.124 68.211,87.122 v1(69.494,87.122) ; v1(70.561,97.511) v1@70.561,97.561 ; v1@85.623,97.561 v1@70.561,97.561 ; v1(90.678,87.071) 90.68,87.073 LED3.2@92.238,87.073 ; v1(90.932,64.973) 92.109,64.973 LED8.2@92.238,65.102 ; LED7.2@116.241,65.102 116.383,64.96 v1(116.383,63.906) ; v1(117.221,97.765) 117.475,98.019 139.979,98.019 v1(141.91,96.088) ; v1(140.233,63.754) 140.233,65.066 LED6.2@140.244,65.076 ; LED4.2@140.244,87.073 141.099,87.073 v1(141.935,87.909) ; LED5.2@164.222,65.102 164.236,65.087 v1(164.236,63.475)
  Bottom Layer w0.35: v1(45.72,87.3) 46.279,87.859 46.279,95.199 v1@47.955,96.876 ; v1(69.494,87.122) 69.926,87.554 69.926,96.876 v1(70.561,97.511) ; v1(90.678,87.071) 84.76,87.071 83.896,87.935 ; v1(90.932,64.973) 84.887,64.973 83.896,65.964 83.896,87.935 ; v1(116.383,63.906) 116.383,59.792 118.11,58.064 136.525,58.064 ; U4.23@117.409,95.82 117.409,97.576 v1(117.221,97.765) 116.002,98.984 87.02,98.984 v1(85.623,97.587) 83.896,95.86 83.896,87.935 ; v1(140.233,63.754) 140.233,61.773 136.525,58.064 ; v1(141.935,87.909) 141.91,87.935 v1(141.91,96.088) 147.904,96.088 149.276,94.717 149.276,59.03 148.311,58.064 ; v1(164.236,63.475) 158.826,58.064 148.311,58.064 ; 136.525,58.064 148.311,58.064
GRID5: LED10.2 LED11.2 LED12.2 LED13.2 LED14.2 LED15.2 LED16.2 LED17.2 U4.20 | length 310.4
  Top Layer w0.35: LED11.2@44.232,65.102 44.564,64.77 v1(45.745,64.77) ; LED12.2@44.257,43.131 44.257,41.95 v1(44.272,41.935) ; v1(66.294,64.465) 66.905,65.076 LED10.2@68.21,65.076 ; v1(67.615,35.839) v1(91.338,35.839) ; LED13.2@68.235,43.105 68.301,43.04 v1(68.301,41.758) ; v1(91.745,30.836) 103.48,30.836 v1@103.607,30.709 ; LED14.2@92.263,43.105 92.354,43.014 v1@92.354,42.088 ; v1(104.877,40.005) 104.877,38.075 106.477,36.474 v1(106.477,36.5) ; v1(131.242,41.961) 131.242,42.993 LED15.2@131.354,43.105 ; LED16.2@155.357,43.131 155.357,41.874 v1(155.423,41.808) ; v1(178.359,41.758) LED17.2@178.359,43.078
  Bottom Layer w0.35: v1(45.745,64.77) 48.717,61.798 48.717,50.724 44.272,46.279 v1(44.272,41.935) 44.272,38.659 47.104,35.827 v1@67.615,35.827 ; v1(66.294,64.465) 65.1,63.271 65.1,45.364 68.301,42.164 v1(68.301,41.758) 68.301,36.424 v1@67.704,35.827 ; v1(91.745,30.836) 91.338,31.242 v1(91.338,35.839) 91.338,41.097 v1(92.329,42.088) ; v1(103.607,30.759) 104.369,31.521 104.369,34.392 v1(106.477,36.5) 107.62,37.643 110.795,37.643 115.113,41.961 v1(131.242,41.961) 131.242,36.703 132.436,35.509 151.232,35.509 ; v1(104.877,40.005) 104.877,56.718 103.861,57.734 103.861,90.551 105.537,92.227 112.152,92.227 113.599,93.675 U4.20@113.599,95.82 ; v1(155.423,41.808) 155.423,39.827 151.232,35.636 151.232,35.509 ; v1(178.359,41.758) 178.359,39.395 174.473,35.509 151.232,35.509